# Altium PCB AIR.PcbDoc
Units mil, origin at the board's own origin, x right, y up, seen from the top; angles counter-clockwise.
Board outline 2440 x 700 mil, 2 copper layers (Top Layer, Bottom Layer); 70 components, 62 nets, 272 pads, 280 vias.
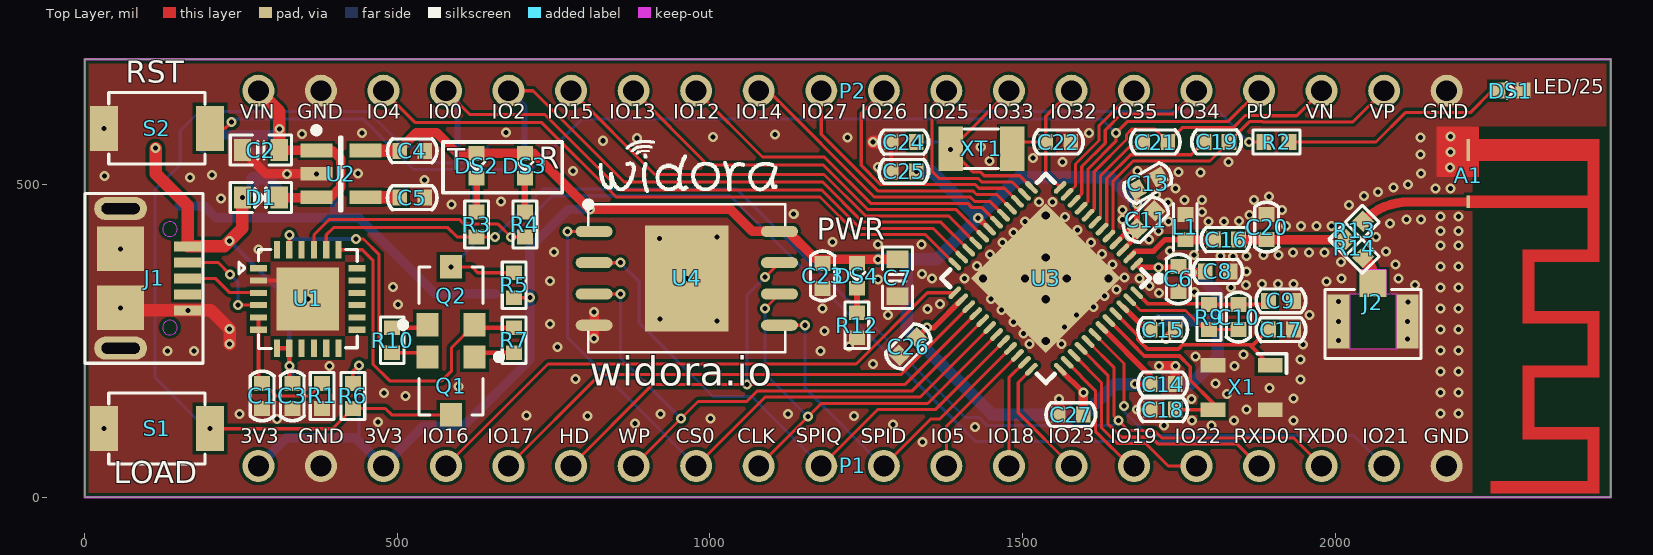
[diagram p0: Top Layer view]
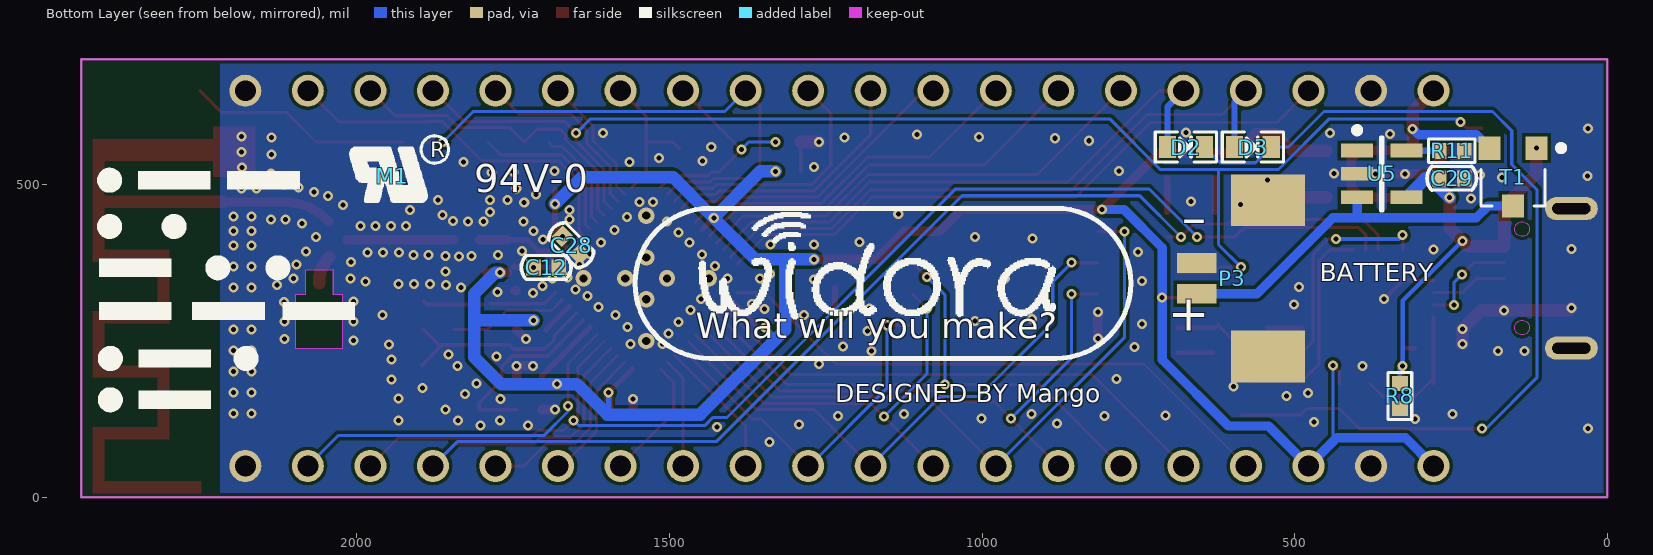
[diagram p1: Bottom Layer view, seen from below]
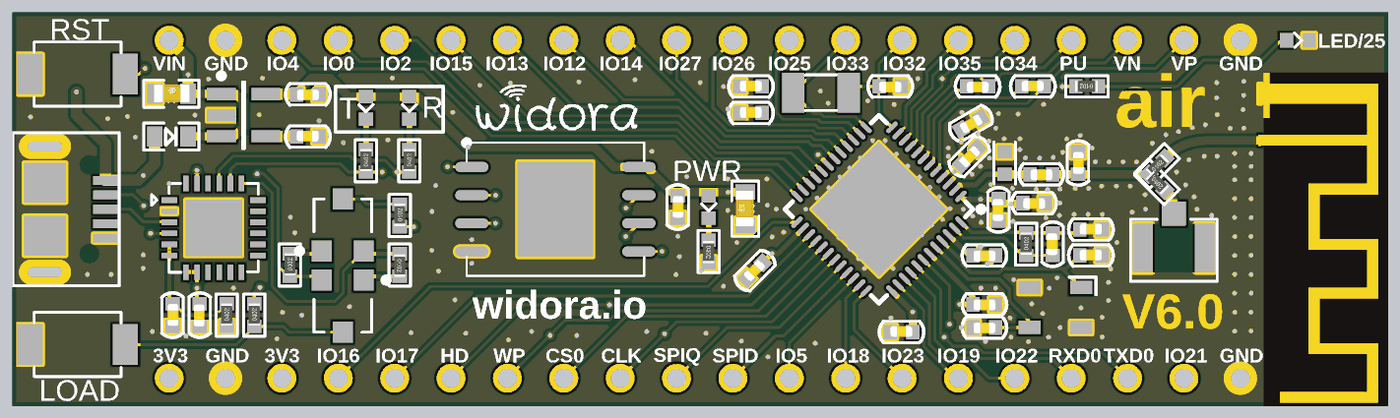
[diagram p2: 3D render of the assembled board from above, using the file's embedded part models]
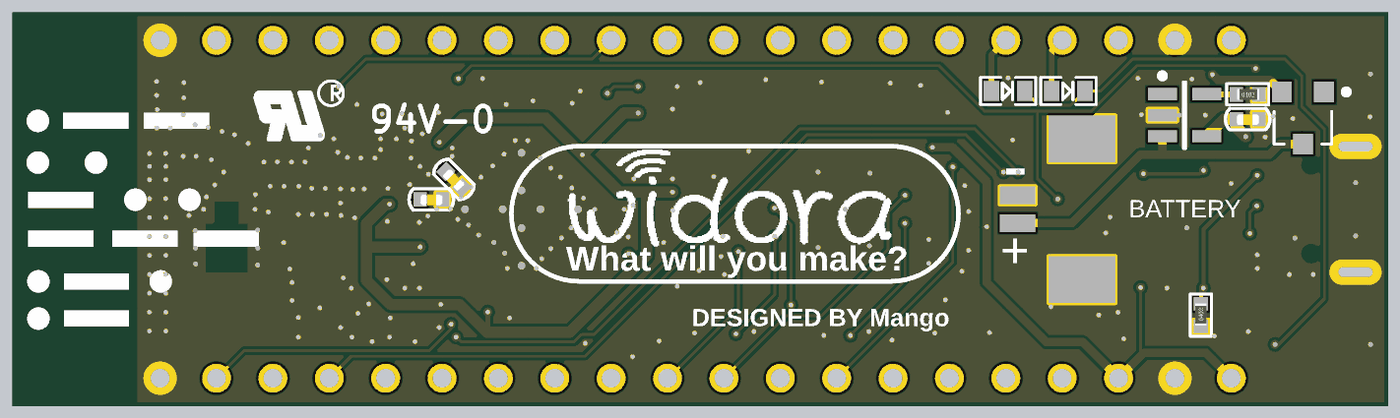
[diagram p3: 3D render of the assembled board from below, using the file's embedded part models]

## Layer stack, top to bottom
Top Solder: solder mask 0.4, Solder Resist, Dk 3.5
Top Layer: signal copper 1.4
Dielectric1: dielectric 12.6, FR-4, Dk 4.8
Bottom Layer: signal copper 1.4
Bottom Solder: solder mask 0.4, Solder Resist, Dk 3.5

## Board outline
0,0 2440,0 2440,700 0,700

## Design rules (kind name [scope] priority, off if disabled: settings)
Clearance Clearance_1 [InPolygon] p1: gap=5
Clearance [All] p2: gap=5
ComponentClearance [All] p1 off: gap=10 collisioncheckmode=3 verticalgap=10 showdistances=FALSE
DiffPairsRouting [All] p1: maxlimit=10 minlimit=10 mostfreqgap=10 toplayer_minwidth=15 toplayer_maxwidth=15 toplayer_prefwidth=15 bottomlayer_minwidth=15 bottomlayer_maxwidth=15 bottomlayer_prefwidth=15 maxuncoupledlength=500
FabricationTestPointUsage TestPointUsage [All] p1 off: valid=0 allowmultiple=FALSE
FabricationTestpoint Testpoint [All] p1 off: side=3 testpointundercomponent=TRUE minsize=40 maxsize=100 preferedsize=60 minholesize=0 maxholesize=40 preferedholesize=32 testpointgrid=1 allowsidetop=TRUE allowsidebottom=TRUE usegrid=TRUE gridtolerance=0.01
Height [All] p1 off: minheight=0 maxheight=1000 prefheight=500
HoleToHoleClearance [All] p1: gap=6 allowstackedmicrovias=TRUE
MinimumSolderMaskSliver [All] p1: minsoldermaskwidth=1
NetAntennae [All] p1: netantennaetolerance=4
PlaneConnect [All] p1: planeconnectstyle=Direct reliefexpansion=20 reliefentries=4 reliefconductorwidth=10 reliefairgap=10
PolygonConnect [All] p1: connectstyle=Direct reliefconductorwidth=10 reliefentries=4 polygonreliefangle="90 Angle" airgapwidth=10
RoutingVias [All] p1: holewidth=8 width=16 viastyle="Through Hole" minholewidth=8 minwidth=16 maxholewidth=28 maxwidth=50
SilkToSilkClearance [All] p1: silktosilkclearance=0
SilkToSolderMaskClearance SilkscreenOverComponentPads [IsPad] p1: minsilkscreentomaskgap=0 clearancetoexposedcopper=TRUE
SolderMaskExpansion [All] p1: expansion=4
Width [All] p1: maxlimit=30 minlimit=5 preferedwidth=6
18 further rules are at their usual default settings.

## Classes and differential pairs
differential pair U: +U_P -U_N

## Components (designator, comment, footprint, x,y, rotation, side; value= is the part's Value field where it differs from the comment)
A1 "WIFI天线" 2.4G 2210,573 r270 top locked
C1 "1uF" C0402 284.02,162 r270 top
C2 "4.7uF" C0603 282,555 r0 top
C3 "1uF" C0402 332.22,162 r90 top
C4 "0.1uF" C0402 524,554 r180 top
C5 "470pF" C0402 524,479 r0 top
C6 "100pF" C0402 1749,349 r90 top
C7 "4.7uF" C0603 1300,350.94 r90 top
C8 "0.1uF" C0402 1812,361 r180 top
C9 "10nF" C0402 1913,314 r0 top
C10 "3nF" C0402 1845,288 r90 top
C11 "100pF" C0402 1697.05,443.68 r225 top
C12 "0.1uF" C0402 1697,367.5 r0 bottom
C13 "1uF" C0402 1700,502 r210 top
C14 "0.1uF" C0402 1724,181 r180 top locked
C15 "100pF" C0402 1724,267.96 r180 top
C16 "6.9pF" C0402 1825,412 r180 top
C17 "15pF" C0402 1913,268 r0 top
C18 "15pF" C0402 1724,140 r180 top locked
C19 "270pF" C0402 1810,568.04 r0 top
C20 "2.4pF" C0402 1890,432 r270 top
C21 "270pF" C0402 1712,568 r180 top
C22 "15pF" C0402 1557,568 r180 top
C23 "0.1uF" C0402 1180,353.94 r270 top
C24 "15pF" C0402 1310,568 r0 top
C25 "0.1uF" C0402 1310,521 r0 top
C26 "0.1uF" C0402 1317,241 r45 top
C27 "0.1uF" C0402 1577,132 r0 top
C28 "0.1uF" C0402 1657,403 r45 bottom
C29 "0.1uF" C0402 249,510 r0 bottom
D1 "1N5819 0603" SOD523 282,479 r0 top
D2 "1N5819 0603" SOD523 674,560 r180 bottom
D3 "1N5819 0603" SOD523 567,560 r180 bottom
DS1 "BLUE" LED0402 2280,650 r0 top
DS2 "YELLOW" LED0402 627,530 r270 top
DS3 "GREEN" LED0402 704,530 r270 top
DS4 "BLUE" LED0402 1235,354 r270 top
J1 "MK5P microUSB" MICROUSB 95,350 r270 top locked
J2 "ipex" "I-PEX SOCKET" 2060,281 r180 top locked
L1 "1.6nH" L0402 1760,432 r270 top
M1 "mark" ZY_UR-3X2 1943,513 r180 bottom locked
P1 "Header 20" HDR1X20-M2 278,50 r0 top locked
P2 "Header 20" HDR1X20-M2 278,650 r0 top locked
P3 "BATT" PH1.25-T 657,350 r90 bottom locked
Q1 "9014" SOT23 586,178 r180 top
Q2 "9014" SOT23 586,322 r0 top locked
R1 "1K" R0402 380,162 r90 top
R2 "5.1K" R0402 1906,568.02 r180 top
R3 "5.1K" R0402 627,436 r90 top
R4 "5.1K" R0402 704,436 r90 top
R5 "5.1K" R0402 687,339 r90 top
R6 "5.1K" R0402 429,162 r90 top
R7 "5.1K" R0402 687,251 r270 top
R8 "5.1K" R0402 332,162 r90 bottom
R9 "20K" R0402 1798,288 r90 top
R10 "5.1K" R0402 492,251 r90 top
R11 "3.3K" R0402 249,554 r180 bottom
R12 "5.1K" R0402 1235,275 r270 top
R13 "0R" R0402 2030.05,426.81 r45 top locked
R14 "0R" R0402 2030,398 r315 top locked
S1 "SW-BUTTON" MINIBUTTON 116,110 r180 top locked
S2 "SW-BUTTON" MINIBUTTON 116,590 r180 top locked
T1 "AO3401" SOT23 151,512 r0 bottom
U1 "CP2104" QFN24 357,317 r0 top locked
U2 "MIC5219-3.3" SOT23-5 410,517 r0 top
U3 "ESP32" QFN40P600X600X100-48N 1537,350 r225 top locked
U4 "W25Q32" WSON-SPIFLASH 963,350 r0 top locked
U5 "LTC4054" SOT23-5 361,517 r180 bottom
X1 "40MHz-3225" XTAL3225 1850,176 r0 top locked
XT1 "32.768K-3215" Y3215 1434,557 r0 top

## Footprints (in the part's own frame and the unit in brackets; to place one, negate y for a bottom-side part, rotate by r counter-clockwise, add the part's x,y. Pads: shape width x height; smd on the part's side, far side on the other; paste and mask are expansions set on the pad)
2.4G [mil]
  rect 20x5 smd paste-39.37: 1(100.4,2.5)
  rect 35.43x5 smd paste-39.37: 2(17.72,2.5)
  Top Layer region: 0,0 35.43,0 35.43,194.88 0,194.88
  Top Layer region: 90.55,0 110.24,0 110.24,194.88 90.55,194.88
  Top Layer region: 547.24,37.79 566.93,37.79 566.93,194.88 547.24,194.88
  Top Layer region: 460.63,193.04 566.93,193.04 566.93,212.72 460.63,212.72
  Top Layer region: 460.63,88.98 480.31,88.98 480.31,194.88 460.63,194.88
  Top Layer region: 379.92,88.98 462.6,88.98 462.6,108.66 379.92,108.66
  Top Layer region: 362.2,88.98 381.89,88.98 381.89,194.88 362.2,194.88
  Top Layer region: 275.59,193.04 381.89,193.04 381.89,212.72 275.59,212.72
  Top Layer region: 275.59,88.98 295.28,88.98 295.28,194.88 275.59,194.88
  Top Layer region: 194.88,89.1 277.56,89.1 277.56,108.78 194.88,108.78
  Top Layer region: 177.16,88.98 196.85,88.98 196.85,194.88 177.16,194.88
  Top Layer region: 0.12,192.91 196.97,192.91 196.97,212.6 0.12,212.6
C0402 [mm]
  rect 0.6x0.65 smd: 1(-0.508,0) 2(0.508,0)
  silkscreen extent -1.01,-0.48 1.01,0.48, body extent -0.51,-0.23 0.49,0.27, height 0.5
C0603 [mm]
  rect 0.7x0.9 smd: 1(-0.75,0) 2(0.75,0)
  silkscreen extent -1.24,-0.61 1.24,0.61, body extent -0.79,-0.38 0.81,0.42, height 0.3
HDR1X20-M2 [mm]
  round 1.3 hole 0.85: 1(0,0) 2(2.54,0) 3(5.08,0) 4(7.62,0) 5(10.16,0) 6(12.7,0) 7(15.24,0) 8(17.78,0) 9(20.32,0) 10(22.86,0) 11(25.4,0) 12(27.94,0) 13(30.48,0) 14(33.02,0) 15(35.56,0) 16(38.1,0) 17(40.64,0) 18(43.18,0) 19(45.72,0) 20(48.26,0)
"I-PEX SOCKET" [mm]
  rect 1.1x1.1 smd: 1(0,-1.55)
  rect 0.9x2.2 smd: 2(1.4,0) 3(-1.4,0)
  Keep-Out Layer pour cut-out: -0.95,1.1 -0.95,-1.101 -0.551,-1.101 -0.551,-2.101 0.001,-2.101 0.55,-2.101 0.55,-1.101 0.95,-1.101 0.95,1.1
  silkscreen extent -1.95,-1.3 1.95,1.5
L0402 [mm]
  rect 0.6x0.65 smd: 1(-0.508,0) 2(0.508,0)
  silkscreen extent -0.95,-0.48 0.95,0.48
LED0402 [mm]
  rect 0.6x0.65 smd: A(-0.508,0) K(0.508,0)
  silkscreen extent -0.15,-0.32 0.18,0.33
MICROUSB [mm] "MICROUSB"
  rect 0.4x1.1 smd: 1(-1.3,1.78) 2(-0.65,1.78) 3(0,1.78) 4(0.65,1.78) 5(1.3,1.78)
  oval 0.94x2.15 hole 0.45 slot 1.55 at 90 deg: 6(-2.835,-0.946) 7(2.835,-0.946)
  rect 1.8x1.9 smd: 8(-1.2,-0.946) 9(1.2,-0.946)
  Keep-Out Layer circle w0.025: c-2,1.054 r0.3
  Keep-Out Layer circle w0.025: c2,1.054 r0.3
  silkscreen extent -3.45,-2.4 3.45,2.4
MINIBUTTON [mil] "MINIBUTTON"
  rect 44.88x72.05 smd: 1(-84.42,0.08) 2(84.88,0.08)
  silkscreen extent -77,-57 77,57
PH1.25-T [mm] "2.0 tie"
  rect 2.1x3 smd: 0(-3.175,-2.9) 0(3.175,-2.9)
  rect 0.8x1.6 smd: 1(0.625,0) 2(-0.625,0)
QFN24 [mm]
  rect 0.7x0.25 smd: 1(-2,1.25) 2(-2,0.75) 3(-2,0.25) 4(-2,-0.25) 5(-2,-0.75) 6(-2,-1.25) 13(2,-1.25) 14(2,-0.75) 15(2,-0.25) 16(2,0.25) 17(2,0.75) 18(2,1.25)
  rect 0.25x0.7 smd: 7(-1.25,-2) 8(-0.75,-2) 9(-0.25,-2) 10(0.25,-2) 11(0.75,-2) 12(1.25,-2) 19(1.25,2) 20(0.75,2) 21(0.25,2) 22(-0.25,2) 23(-0.75,2) 24(-1.25,2)
  rect 2.55x2.55 smd: 25(0,0)
  silkscreen extent -2.79,-2.01 2.01,2.01
QFN40P600X600X100-48N [mm] "QFN, 48-Leads, Body 6.0x6.0mm (max), Pitch 0.40mm, IPC Medium Density"
  oval 0.65x0.2 smd: 1(-3.025,2.2) 2(-3.025,1.8) 3(-3.025,1.4) 4(-3.025,1) 5(-3.025,0.6) 6(-3.025,0.2) 7(-3.025,-0.2) 8(-3.025,-0.6) 9(-3.025,-1) 10(-3.025,-1.4) 11(-3.025,-1.8) 12(-3.025,-2.2) 25(3.025,-2.2) 26(3.025,-1.8) 27(3.025,-1.4) 28(3.025,-1) 29(3.025,-0.6) 30(3.025,-0.2) 31(3.025,0.2) 32(3.025,0.6) 33(3.025,1) 34(3.025,1.4) 35(3.025,1.8) 36(3.025,2.2)
  oval 0.2x0.65 smd: 13(-2.2,-3.025) 14(-1.8,-3.025) 15(-1.4,-3.025) 16(-1,-3.025) 17(-0.6,-3.025) 18(-0.2,-3.025) 19(0.2,-3.025) 20(0.6,-3.025) 21(1,-3.025) 22(1.4,-3.025) 23(1.8,-3.025) 24(2.2,-3.025) 37(2.2,3.025) 38(1.8,3.025) 39(1.4,3.025) 40(1,3.025) 41(0.6,3.025) 42(0.2,3.025) 43(-0.2,3.025) 44(-0.6,3.025) 45(-1,3.025) 46(-1.4,3.025) 47(-1.8,3.025) 48(-2.2,3.025)
  rect 4.3x4.3 smd: 49(0,0)
  silkscreen extent -3.37,-3 3,3.38, body extent -3,-3 3,3, height 1
R0402 [mm]
  rect 0.6x0.65 smd: 1(-0.508,0) 2(0.508,0)
  silkscreen extent -0.95,-0.48 0.95,0.48, body extent -0.47,-0.25 0.53,0.25, height 0.35
SOD523 [mm]
  rect 0.7x0.9 smd: A(-0.75,0) K(0.75,0)
  silkscreen extent -1.24,-0.61 1.24,0.61
SOT23 [mm] "SOT-23; 3 Leads; Body 3.0 x 2.5 mm, inc. leads (LxW max)"
  rect 0.9x0.95 smd: 1(-0.95,-1.175) 2(0.95,-1.175) 3(0,1.175)
  silkscreen extent -2.07,-1.3 1.3,1.18
SOT23-5 [mm] "SOT23, 5-Leads, Body 3.0x2.6mm (max), Pitch 0.95mm, IPC Medium Density"
  rect 1.3x0.55 smd: 1(-1,0.95) 2(-1,0) 3(-1,-0.95) 4(1,-0.95) 5(1,0.95)
  silkscreen extent -1.12,-1.5 0.05,1.9, body extent -0.7,-1.5 0.7,1.5, height 1.1
WSON-SPIFLASH [mm]
  oval 1.5x0.45 smd: 1(-3.764,1.905) 2(-3.764,0.635) 3(-3.764,-0.635) 4(-3.764,-1.905) 5(3.764,-1.905) 6(3.764,-0.635) 7(3.764,0.635) 8(3.764,1.905)
  rect 3.4x4.3 smd: 4(0,0)
  silkscreen extent -4.12,-3 4,3.12
XTAL3225 [mm] "XTAL3225"
  rect 1x0.6 smd: 1(1.16,0.887) 2(-1.16,0.887) 3(-1.16,-0.913) 4(1.16,-0.913)
  silkscreen extent 0.64,0.57 1.83,1.36
Y3215 [mm]
  rect 1x1.8 smd: 1(-1.25,0) 2(1.25,0)
  silkscreen extent -0.7,-0.8 0.7,0.8
ZY_UR-3X2 [mil]
  silkscreen extent -67,-40 90,65

## Part data
A1: library part ANT2.4G
C1 C2 C3 C4 C5 C6 C7 C8 C9 C10 C11 C12 C13 C14 C15 C17 C18 C19 C21 C22 C23 C24 C25 C26 C27 C28 C29: library part CAP, "普通小电容"
C16 C20: library part CAP, "射频电容"
D1 D2 D3: library part Diode, "普通二极管"
DS1 DS2 DS3 DS4: library part LED, "LED"
J1: library part MICRO_USB, "4固定脚microUSB座"
J2: library part MCX_IPEX
L1: library part L0402, "射频电感"
P1 P2: "Header, 20-Pin"
P3: library part "Header 2T", "Header, 4-Pin"
Q1 Q2: library part NPN, "NPN三极管"
R1 R2 R3 R4 R5 R6 R7 R8 R9 R10 R11 R12 R13 R14: library part RES, "普通电阻"
T1: library part MOS-P
U2: library part MIC5219
U4: library part SPIFLASH_SOP8W
U5: "锂电池管理芯片"
X1: library part XTAL3225
XT1: library part XT, "晶振"

## Via types
v1: diameter 16, hole 8, Top Layer to Bottom Layer, tented both sides, 272 vias
v2: diameter 25.98, hole 12.99, Top Layer to Bottom Layer, tented both sides, 8 vias

## Nets (pads, with @x,y where several pads share a name; then routed paths per layer and width w, separated by ;. In a path a pad name is that pad's centre, name@x,y a point inside that pad or via, vN(x,y) a via of type N, cw(c..) or ccw(c..) an arc to the next point about the centre after c; other vN are vias at no path point)
CHIP_PU: P2.17 Q2.3 R5.2 S2.1 U3.9 | length 2207.3
  Top Layer w5: S2.1 224.92,589.92 v1(235,600) ; v1(586,368.26) 619.46,368.26 628.72,359 R5.2 ; U3.9 1604.48,473.16 1604.48,524.62 1649,569.14 v1(1649,582) 1668,601 1829,601 P2.17
  Bottom Layer w5: v1(235,600) 236,600 241,605 445,605 526,524 622,524 ; v1(586,368.26) 586.34,368.26 622,403.92 622,524 ; v1(1649,582) 1626,605 796,605 715,524 622,524
DL: D2.K D3.K Q1.3 R6.1 S1.1 | length 1484.6
  Top Layer w5: v1(200.42,109.92) 200.84,109.5 396.5,109.5 R6.1 480.74,142 491,131.74 Q1.3
  Bottom Layer w5: v1(200.42,109.92) 194.08,109.92 113,191 113,492 153,532 153,586 183.74,616.74 453.26,616.74 510,560 D3.K 562.69,534.78 619.26,534.78 D2.K
DTR: Q1.2 R10.1 U1.23 | length 403.5
  Top Layer w5: v1(434,413) 446,413 471,388 471,249 R10.1@489,231 ; R10.1 541.86,231 Q1.2
  Top Layer w6: U1.23 v1(327.47,419)
  Bottom Layer w6: v1(327.47,419) 333.47,413 v1(434,413)
GND: A1.2 C1.2 C2.1 C3.1 C4.1 C5.2 C6.1 C7.1 C8.1 C9.2 C11.1 C12.1 C13.1 C14.1 C15.1 C17.2 C18.2 C20.1 C22.1 C23.2 C24.1 C25.1 C26.1 C27.1 C28.1 C29.1 DS1.K J1.5 J1.6 J1.7 J1.8 J1.9 J2.2 J2.3 L1.1 P1.2 P1.20 P2.2 P2.20 P3.0 P3.1 R1.1 R8.1 R11.2 R12.2 S1.2 S2.2 U1.2 U1.25 U2.2 U3.49 U4.4 U5.2 X1.2 X1.4 | length 682.6
  Top Layer w6: C25.1 C24.1 ; v1(1347.59,301) v1@1352,301
  Top Layer w7: U1.2 327.47,346.53 v1(357,317)
  Top Layer w15: C2.1 290.47,517 v1(370.63,517) ; v1(814.81,254) 814.81,275 v1(814.81,296) ; C27.1@1558,133 v1(1558,157) ; v1(1683,140) C18.2 ; v1(1718,210) v1(1744,210) C14.1 ; v1(1729.32,253.27) C15.1 ; C6.1@1744.72,330 C6.1@1747,330
  Top Layer w20: v1(57.74,302.75) 61.39,299.1 164.8,299.1 v1(165.09,298.81) 202.19,298.81 v1(232,269) v1(232,245) ; v1(1261,568) C24.1
  other v1: 1340,88 31.12,109.92 1424,112 1726,115 1802,115 1293,116 880,118 469,120 1771,123 1838,123 1933,123 308,125 1001,126 804,130 1230,130 707,131 248,133 921,133 1125,133 2168,133.6 2197,133.6 1858,140 1770,157 1933,158 513,162 1827,165 479,167 2168,167.2 2197,167.2 1895,175 598,177 1808,182 1944,188 785,189 2168,200.8 2197,200.8 392,210 1839,210 1261,213 1944,220 1776,225 1853,228 133,234 175,234 1177,234 2168,234.4 2197,234.4 756,240 1222,241 1948,244 1511,245 1562,245 2005,251 2115,253 1501,262 1183,266 2168,268 2197,268 1567,272 744,277 1485,280 2004.88,281 2115.12,281 1011,282 920,285 1285,291 1586,291 1959,291 1466,299 1180,302 2168,301.6 2197,301.6 1613,304 501,308 1368,309 2116,312 2005,313 1449,317 1631,322 1718.18,326.74 1775,328.4 1650,332 1833,335 2168,335.2 2197,335.2 493,336 1703,338 1857,339 2127,339 1883,341 1908,341 1933,341 1986,345 744,346 1269,348 963,350 1355,350 1407,350 1687,350 2010,350 2101,350 1663,351 1339,357 1858,361 2168,368.8 2197,368.8 1427,370 1644,372 2096,372 2009,376 1836,385 1816,386 1858,386 1774,387 1885,387 1909,387 1448,388 1627,389 1932,391 1958,391 1983,391 751,392 2081,393 1735.35,393.9 278.26,395.74 57.74,397.23 2168,402.4 2197,402.4 1269,404 1338,404 1468,407 1609,407 1196,408 1702,412 919,414 1011,416 2065,416 1485,423 1717,426 2168,426 2197,426 1588,427 1921,434 1945,434 1970,434 1994,434 2087,438 1504,441 1733,441 1797,441 1822,441 1846,442 1660,444 2114,444 2137,444 1568,448 2168,449 2197,449 1863,451 1134,453 1787,456 1660,459 1915,459 2022,467 587,468 1732,471 1526,472 1548,472 666,473 1759,475 1787,475 1870,475 218,478 1894,481 2046,482 1713,484 2068,488 1744,494 2160,494 2184,494 2093,495 2116,500 544,507 169,511 32,514 204,515 324,517 437.56,518 2137,518 1784,519 1749,520 781,522 1684,522 2183,527 1269,528 1564,536 1829,536 1447,538 1516.87,542.37 2136,548 2184,552 1433,560 829,570 883,574 1220,575 2136,575 1005,576 2184,577 1104,580 348,581 1606,582 443.63,582.53 674,583 31.12,589.92
  other v2: 1537,249.78 1537,316.59 1436.78,350 1503.59,350 1570.41,350 1637.22,350 1537,383.41 1537,450.22
GPI34: P2.16 U3.10 | length 306.5
  Top Layer w5: U3.10 1594.48,485.43 1594.48,528.77 1632,566.28 1632,587 1658,613 1741,613 P2.16
GPI35: P2.15 U3.11 | length 210
  Top Layer w5: U3.11 1584.48,497.7 1584.48,532.91 1622,570.43 1622,594 P2.15
GPIO0: D3.A P2.4 U3.23 | length 1032.5
  Top Layer w5: P2.4 616,612 736,612 857,491 1179.14,491 1240.33,429.81 1356.97,429.81 U3.23
  Bottom Layer w10: P2.4 596.53,631.47 D3.A
GPIO2: D2.A P2.5 U3.22 | length 946.9
  Top Layer w5: P2.5 717,650 863,504 1180.28,504 1244.48,439.81 1369.24,439.81 U3.22
  Bottom Layer w10: P2.5 703.53,624.47 D2.A@703.53,555
GPIO4: P2.3 U3.24 | length 1028.3
  Top Layer w5: P2.3 529,599 731,599 850,480 1176,480 1236.19,419.81 1344.7,419.81 U3.24
GPIO5: P1.12 U3.34 | length 223.9
  Top Layer w5: P1.12 1378,99 1378,113.05 U3.34
GPIO12: P2.8 U3.18 | length 567.4
  Top Layer w5: P2.8 1084,544 1182.71,544 1256.9,469.81 1412.07,469.81 1418.88,463 1435.14,463 U3.18
GPIO13: P2.7 U3.20 | length 654.4
  Top Layer w5: P2.7 997,531 1181.57,531 1252.76,459.81 1393.79,459.81 U3.20
GPIO14: P2.9 U3.17 | length 474
  Top Layer w5: P2.9 1093,650 1263.19,479.81 1416.21,479.81 1423.02,473 1447.41,473 U3.17
GPIO15: P2.6 U3.21 | length 747.9
  Top Layer w5: P2.6 912,516 1182.43,516 1248.62,449.81 1381.52,449.81 U3.21
GPIO16: P1.4 U3.25 | length 928.3
  Top Layer w5: P1.4 741,213 1233.69,213 1347.73,327.03 U3.25
GPIO17: P1.5 U3.27 | length 841.3
  Top Layer w5: P1.5 824,196 1305.05,196 U3.27
GPIO18: P1.13 U3.35 | length 176
  Top Layer w5: P1.13 1478,190.78 U3.35
GPIO19: P1.15 U3.38 | length 213.5
  Top Layer w5: U3.38 1616.31,170.47 1616.31,105.69 1672,50 P1.15
GPIO21: P1.19 U3.42 | length 594.5
  Top Layer w5: U3.42 1662,213.86 v1(1662,146)
  Bottom Layer w5: v1(1662,146) 1662,137 1700,99 2029,99 P1.19
GPIO22: P1.16 U3.39 | length 311.2
  Top Layer w5: U3.39 1626.31,182.74 1626.31,110.69 1651,86 1697,86 1733,50 P1.16
GPIO23: P1.14 U3.36 | length 198.5
  Top Layer w5: U3.36 1493,183.51 1493,135 P1.14
GPIO25: P2.12 R2.2 U3.14 | length 843.6
  Top Layer w5: P2.12 1355,627 1355,521 1366.19,509.81 1428.64,509.81 1434.38,504.07 1483.15,504.07 U3.14 ; v1(1862.02,568.02) R2.2
  Bottom Layer w5: P2.12 1411.09,616.91 1813.13,616.91 v1(1862.02,568.02)
GPIO26: P2.11 U3.15 | length 407.9
  Top Layer w5: P2.11 1242,614 1242,530.55 1272.74,499.81 1424.5,499.81 1430.3,494 1470.95,494 U3.15
GPIO27: P2.10 U3.16 | length 421.2
  Top Layer w5: P2.10 1178,580.4 1268.6,489.81 1420.35,489.81 1426.16,484 1458.68,484 U3.16
GPIO32: C22.2 P2.14 U3.12 XT1.2 | length 239.4
  Top Layer w5: XT1.2 1494.21,568 C22.2 ; U3.12 1537,518.42 C22.2 ; P2.14 1537,609 C22.2
GPIO33: C24.2 P2.13 U3.13 XT1.1 | length 362.2
  Top Layer w5: XT1.1@1373.79,568 XT1.1 ; P2.13 1478,649.21 v1(1384.79,556) 1420.98,519.81 1432.78,519.81 1438.52,514.07 1495.42,514.07 U3.13
  Bottom Layer w5: v1(1330,568) 1372.79,568 v1(1384.79,556)
NetA1_1: A1.1 R13.2 | length 176.9
  Top Layer w15: R13.2 2045.95,442.71 cw(c2116.66,372) 2116.66,472 A1.1@2212.5,472
NetC1_1: C1.1 R1.2 U1.5 U1.6 | length 220.3
  Top Layer w5: C1.1@282.82,185.8 306.93,161.68 359.68,161.68 R1.2
  Top Layer w7: C1.1@278.26,182.76 U1.6 U1.5
NetC5_1: C5.1 U2.4 | length 54
  Top Layer w20: U2.4 C5.1@503.4,479.6
NetC9_1: C9.1 C10.2 R9.2 U3.48 | length 208.6
  Top Layer w6: U3.48 1700.3,309.19 1765.11,309.19 R9.2@1786.19,309.19 ; R9.2 C10.2 1887,308 C9.1
NetC10_1: C10.1 R9.1 U3.47 | length 203.9
  Top Layer w5: U3.47 1688.53,298.69 1760.31,298.69 1791,268 R9.1 C10.1
  Top Layer w6: U3.47@1671.68,315.9 U3.47 U3.47@1678.39,308.83
NetC16_1: C16.1 C20.2 R13.1 R14.1 | length 170
  Top Layer w15: C16.1 R13.1@2015,412
NetC17_1: C17.1 U3.45 X1.1 | length 330.9
  Top Layer w6: U3.45 1649.05,293.27 1684.19,258.13 1684.19,251.85 1688.88,247.16 1689.41,247.16 1699.57,237 1748.96,237 1755.96,244 1862.6,244 ; C17.1 1869,244 1862.6,244 ; X1.1 1862.6,244
NetC18_1: C18.1 U3.44 X1.3 | length 304.9
  Top Layer w6: U3.44 1638.53,282.49 1673.19,247.83 1673.19,247.29 1694.48,226 1750.63,226 1768,208.63 1768,187 1804.33,150.67 X1.3 C18.1@1744,140.07
NetC19_1: C19.1 U3.6 | length 263.9
  Top Layer w5: U3.6 1634.48,436.35 1634.48,509.62 1672.56,547.7 1769.66,547.7 C19.1
NetC21_2: C21.2 U3.7 | length 168.8
  Top Layer w5: U3.7 1624.48,448.62 1624.48,513.77 1671.72,561 1688,561 C21.2
NetDS1_A: DS1.A R2.1 | length 358.4
  Top Layer w5: R2.1 2065.02,568.02 2112,615 2215.47,615 DS1.A@2250.47,650
NetDS2_K: DS2.K R3.2 | length 54
  Top Layer w10: R3.2 DS2.K
NetDS3_K: DS3.K R4.2 | length 54
  Top Layer w10: R4.2 DS3.K
NetDS4_K: DS4.K R12.1 | length 39
  Top Layer w10: R12.1 DS4.K
NetJ2_1: J2.1 R14.2 | length 46.1
  Top Layer w20: R14.2 cw(c2005.86,345.57) 2060,345.57 J2.1
NetQ1_B: Q1.1 R7.2 | length 56.9
  Top Layer w7: Q1.1@630.14,231 R7.2
NetQ2_B: Q2.1 R10.2 | length 54.9
  Top Layer w7: R10.2@489,271 Q2.1@543.86,271
NetR11_1: R11.1 U5.5 | length 52.2
  Bottom Layer w10: R11.1 U5.5@321.23,554
RF: C16.2 L1.2 U3.2 | length 145.9
  Top Layer w9: U3.2 1680.72,393.5 1709.25,393.5 1727.75,412 L1.2@1758,412 ; L1.2@1756.81,413.19 L1.2@1758,412 ; L1.2 L1.2@1758,412
  Top Layer w15: L1.2 C16.2@1804,412
RTS: Q2.2 R7.1 U1.19 | length 525.9
  Top Layer w5: U1.19 444.26,395.74 461,379 461,213 488,186 571,186 587,202 587,239.34 Q2.2
  Top Layer w7: Q2.2 628.14,271 R7.1
RXD0: P1.17 R4.1 U1.21 U3.40 | length 2192.9
  Top Layer w5: U1.21 366.84,419.5 391.6,444.26 599.14,444.26 606.7,436.69 661.31,436.69 v1(682,416) R4.1 ; U3.40 1636.31,195.01 1636.31,117.69 1658,96 1706,96 1717,85 1843,85 P1.17
  Bottom Layer w5: v1(682,416) 748,482 1032.08,482 1425.08,89 1839,89 P1.17
SENS_VN: C21.1 P2.18 U3.8 | length 507
  Top Layer w5: U3.8 1614.48,460.89 1614.48,520.48 1666,572 1666,580 1674.3,588.3 1711.7,588.3 C21.1 ; C21.1@1735.61,571.61 1755,591 1836.86,591 1856.36,610.5 1887.56,610.5 ; 1888.06,610 1938,610 P2.18
SENS_VP: C19.2 P2.19 U3.5 | length 584.5
  Top Layer w5: U3.5 1644.48,424.07 1644.48,505.48 1676.7,537.7 1799.66,537.7 C19.2 1862.46,600.5 1875.39,600.5 1883.42,600.5 1883.92,600 2028,600 P2.19
SPICLK: P1.9 U3.31 U4.6 | length 701.8
  Top Layer w5: P1.9 v1(1156.74,128.74) 1178,150 1348.14,150 U3.31 ; v1(1088,301.81) U4.6
  Bottom Layer w5: v1(1088,301.81) 1088,197.47 v1(1156.74,128.74)
SPICS0: P1.8 U3.30 U4.1 | length 1064.3
  Top Layer w5: v1(772,425.19) 772.19,425 U4.1 ; P1.8 1088,160 1335.86,160 U3.30
  Bottom Layer w5: v1(772,425.19) 772,256 P1.8
SPID: P1.11 U3.33 U4.5 | length 597.8
  Top Layer w5: U4.5 v1(1152.19,275) ; P1.11 1353,125 1367.68,125 U3.33
  Bottom Layer w5: v1(1152.19,275) 1152.19,174 P1.11@1276.19,50
SPIHD: P1.6 U3.28 U4.7 | length 964.5
  Top Layer w5: P1.6 908,180 v1(1059,180) 1311.32,180 U3.28 ; v1(1088.31,352.12) U4.7
  Bottom Layer w5: v1(1059,180) 1059,322.81 v1(1088.31,352.12)
SPIQ: P1.10 U3.32 U4.2 | length 910.3
  Top Layer w5: U4.2 v1(856.81,375) ; P1.10 1268,140 1360.41,140 U3.32
  Bottom Layer w5: v1(856.81,375) 887,344.81 887,279 1004.85,161.15 1066.85,161.15 P1.10
SPIWP: P1.7 U3.29 U4.3 | length 948.8
  Top Layer w5: U4.3 v1(856.81,325) ; P1.7 981,153 1059,153 1076,170 1323.59,170 U3.29
  Bottom Layer w5: v1(856.81,325) 856.81,223 938.91,140.91 ; v1@948.31,131.5 938.91,140.91 ; v1(953.73,126.08) 938.91,140.91
TXD0: P1.18 R3.1 U1.20 U3.41 | length 1994.8
  Top Layer w5: U1.20 386.53,419.53 398,431 581,431 596,416 R3.1 v1(656,416) ; U3.41 1646.31,207.28 1646.31,129.69 v1(1653,123) 1669.29,106.71 1710.29,106.71 1722,95 1933,95 P1.18
  Bottom Layer w5: v1(656,416) 733,493 1042.25,493 1407.75,127.5 1430.42,127.5 1443.42,114.5 1644.5,114.5 v1(1653,123)
U_N: J1.2 U1.4 | length 163
  Top Layer w5: J1.2 213.42,375.58 v1(233,356) ; v1(245.16,307.16) U1.4
  Bottom Layer w5: v1(233,356) 245.16,343.84 v1(245.16,307.16)
U_P: J1.3 U1.3 | length 122.8
  Top Layer w5: J1.3 209.01,349.99 231.34,327.66 277.44,327.66 U1.3
USB5V: C3.2 C29.2 D1.A J1.1 R8.2 T1.1 U1.7 U1.8 U5.4 | length 775.4
  Top Layer w7: U1.7 U1.8 v1(327.47,210) 327.47,183.25 C3.2@326.22,182
  Top Layer w20: v1(113.6,558.26) 113.6,517.4 165.09,465.91 J1.1 223.17,401.17 v1(232,410) 252.47,430.47 v1(252.47,479)
  Bottom Layer w7: v1(232,410) 327.47,314.53 v1(327.47,210) 332,205.47 R8.2
  Bottom Layer w20: v1(252.47,479) 269,495.53 C29.2 291.23,510 U5.4
V_BAT: P3.2 T1.3 U5.3 | length 596.4
  Bottom Layer w15: T1.3 191.26,465.74 210,447 439,447 560.61,325.39 P3.2 ; 400.37,447.37 U5.3
VCC3V3: C4.2 C6.2 C7.2 C8.2 C11.2 C12.2 C13.2 C14.2 C15.2 C23.1 C25.2 C26.2 C27.2 C28.2 DS2.A DS3.A DS4.A P1.1 P1.3 R5.1 R6.2 U2.5 U3.1 U3.3 U3.4 U3.19 U3.26 U3.37 U3.43 U3.46 U4.8 | length 4265.2
  Top Layer w6: R6.2 429,201 v1(439,211) ; C4.2@503.6,554.4 C4.2 ; R5.1 v1(712,319)
  Top Layer w8: U3.4 1671.54,428.86 C11.2@1682.86,428.86 ; U3.3 1682.91,417.96 C11.2
  Top Layer w9: C26.2 v1(1347.28,271.28) 1358.06,271.28 U3.26 ; v1(1429,446.86) U3.19 ; U3.37 v1(1597,167.51) ; U3.43 1704,194.14 C14.2 ; U3.46 C15.2@1696.99,267.96 ; U3.1 1687.93,367.5 1747.5,367.5 C6.2
  Top Layer w10: v1(1680,181) C14.2 ; C13.2 1682.86,491.82 v1(1682.86,469) C11.2
  Top Layer w12: C11.2@1682.74,428.97 C11.2@1682.86,428.86
  Top Layer w15: C4.2 504,556.28 530.72,583 563,583 596,550 DS2.A DS3.A 718,550 v1(808,460) 1033,460 1068,425 U4.8 1125,425 1169.54,380.46 v1(1269,380.46) C7.2 ; C27.2 v1(1597,167.51) ; C6.2@1758.57,359.43 1770.99,359.43 C8.2@1792,359.84
  Top Layer w20: U2.5 C4.2@503.6,554.4
  Bottom Layer w5: 439,89 v1(439,211)
  Bottom Layer w9: 1328,254.67 1330.67,254.67 v1(1347.28,271.28) ; v1(1597,167.51) 1597,134 1599,132 ; 1810.96,282.96 1812,284
  Bottom Layer w15: P1.1 323,95 433,95 439,89 P1.3 542,114 606,114 712,220 v1(712,319) 712,399 773,460 v1(808,460)
  Bottom Layer w20: v1(1269,380.46) 1315,380.46 ; v1(1330,521) 1354.86,521 v1(1429,446.86) ; v1(1682.86,469) 1639.86,512 1494.14,512 v1(1429,446.86) ; v1(1717,282.96) 1810.96,282.96 ; v1(1771,359) 1778,359 1812,325 1812,284 1812,224 1769,181 1648,181 1599,132 1450.67,132 1328,254.67 1315,267.67 1315,380.46 ; 1315,380.46 1362.6,380.46 v1(1429,446.86)
  other v1: 1717,367.5 1671.14,417.14
VIN: C2.2 D1.K P2.1 T1.2 U2.1 U2.3 | length 497.8
  Top Layer w15: D1.K U2.3@370.03,479 ; C2.2 U2.1@370.03,555 ; U2.3 393.6,479.6 410,496 410,541 396.6,554.4 U2.1
  Top Layer w20: P2.1 311.53,616.47 v1(311.53,589) C2.2
  Bottom Layer w15: T1.2 209.64,579.5 302.03,579.5 v1(311.53,589)
pads on no net: J1.4 U1.1 U1.9 U1.10 U1.11 U1.12 U1.13 U1.14 U1.15 U1.16 U1.17 U1.18 U1.22 U1.24 U5.1

## Polygon pours and split planes (outlines as drawn)
GND on Top Layer "Bottom Layer-No Net" (solid, remove dead copper, pour order 1000): 1.73,701.01 2440,701.01 2440,1.01 1.73,1.01
GND on Bottom Layer "Bottom Layer-No Net" (solid, remove dead copper, pour order 1001): 1.13,700.13 2440.41,700.13 2440.41,0.13 1.13,0.13

## Keep-outs
Keep-Out Layer:
  the board outline again, w4

## Other copper
Top Layer:
  rectangle net NetA1_1: 2184,466.6 2212.5,478
  rectangle net GND: 2162,512 2230,592.54
  pour cut-out: 1787.39,395.44 1778.98,395.44 1778,394.46 1778,399.51 1787.39,399.51
  pour cut-out: 1777.8,428.81 1786.2,428.81 1787.19,429.8 1787.19,424.74 1777.8,424.74
  pour cut-out: 1814,431 1835,431 1835,394.2 1824,394 1814,394.2
  pour cut-out: 2219,593 2433.36,593 2433.36,0.64 2219,0.64
  pour cut-out: 2013.35,389.72 2038.52,414.89 2046.67,406.73 cw(c2034.63,406.73) 2043.14,398.21 2024,379.07
  pour cut-out: 2019.72,441.65 2044.89,416.48 2036.73,408.33 cw(c2036.73,420.37) 2028.21,411.86 2009.07,431
Bottom Layer:
  pour cut-out: 2428,700 2218,700 2218,0 2428,0

## Silkscreen, mask and mechanical layers (free items; w line width, h text height)
Top Overlay:
  drawing of 555 lines, arcs and shapes, not listed
  text "RST" at 66,651 h60
  text "LED/25" at 2316,637 h40
  text "VIN" at 249,596.79 h40
  text "GND" at 340,596.79 h40
  text "IO4" at 451,596.79 h40
  text "IO0" at 550,596.79 h40
  text "IO2" at 651,596.79 h40
  text "IO15" at 740,596.79 h40
  text "IO13" at 839,596.79 h40
  text "IO12" at 941,596.79 h40
  text "IO14" at 1041,596.79 h40
  text "IO27" at 1146.18,596.79 h40
  text "IO26" at 1241,596.79 h40
  text "IO25" at 1340,596.79 h40
  text "IO33" at 1443,596.79 h40
  text "IO32" at 1544,596.79 h40
  text "IO35" at 1642,596.79 h40
  text "IO34" at 1741,596.79 h40
  text "PU" at 1857.18,597.03 h40
  text "VN" at 1953,596.79 h40
  text "VP" at 2055,596.79 h40
  text "GND" at 2140,596.79 h40
  text "R" at 726,513 h60
  text "T" at 580,511 h60
  text "PWR" at 1171,400 h60
  text "widora.io" at 808,162 h80
  text "SPIQ" at 1136.88,79.06 h40
  text "3V3" at 249,78.17 h40
  text "GND" at 342,77.99 h40
  text "3V3" at 447.07,77.97 h40
  text "IO16" at 540,77.99 h40
  text "IO17" at 644,77.99 h40
  text "HD" at 759,77.97 h40
  text "WP" at 853,77.97 h40
  text "CS0" at 945.64,77.99 h40
  text "CLK" at 1044,77.97 h40
  text "SPID" at 1241.14,77.99 h40
  text "IO5" at 1353,77.99 h40
  text "IO18" at 1444,77.99 h40
  text "IO23" at 1541.15,77.99 h40
  text "IO19" at 1640.15,77.99 h40
  text "IO22" at 1742.9,77.99 h40
  text "RXD0" at 1837.31,78.17 h40
  text "TXD0" at 1934.88,78.17 h40
  text "IO21" at 2043.12,77.99 h40
  text "GND" at 2141,77.99 h40
  text "LOAD" at 47,10 h60
Bottom Overlay:
  drawing of 571 lines, arcs and shapes, not listed
  text "-" at 639,382 h150
  text "BATTERY" at 460,336 h50
  text "+" at 636,247 h100
  text "What will you make?" at 1458,241 h70
  text "DESIGNED BY Mango" at 1235,142.5 h50
Top Solder:
  region: 2440,0.64 2440,593 2219,593 2219,0.64
  text "air" at 1955,496 h150
  text "V6.0" at 1968,138 h100

## Text inside footprints (layer, text, board x,y; h text height)
M1: Bottom Overlay "R" at 1882,543.5 h25; Bottom Overlay "94V-0" at 1812,488 h45